# EAGLE board powerlinecontroller (EAGLE 5.08)
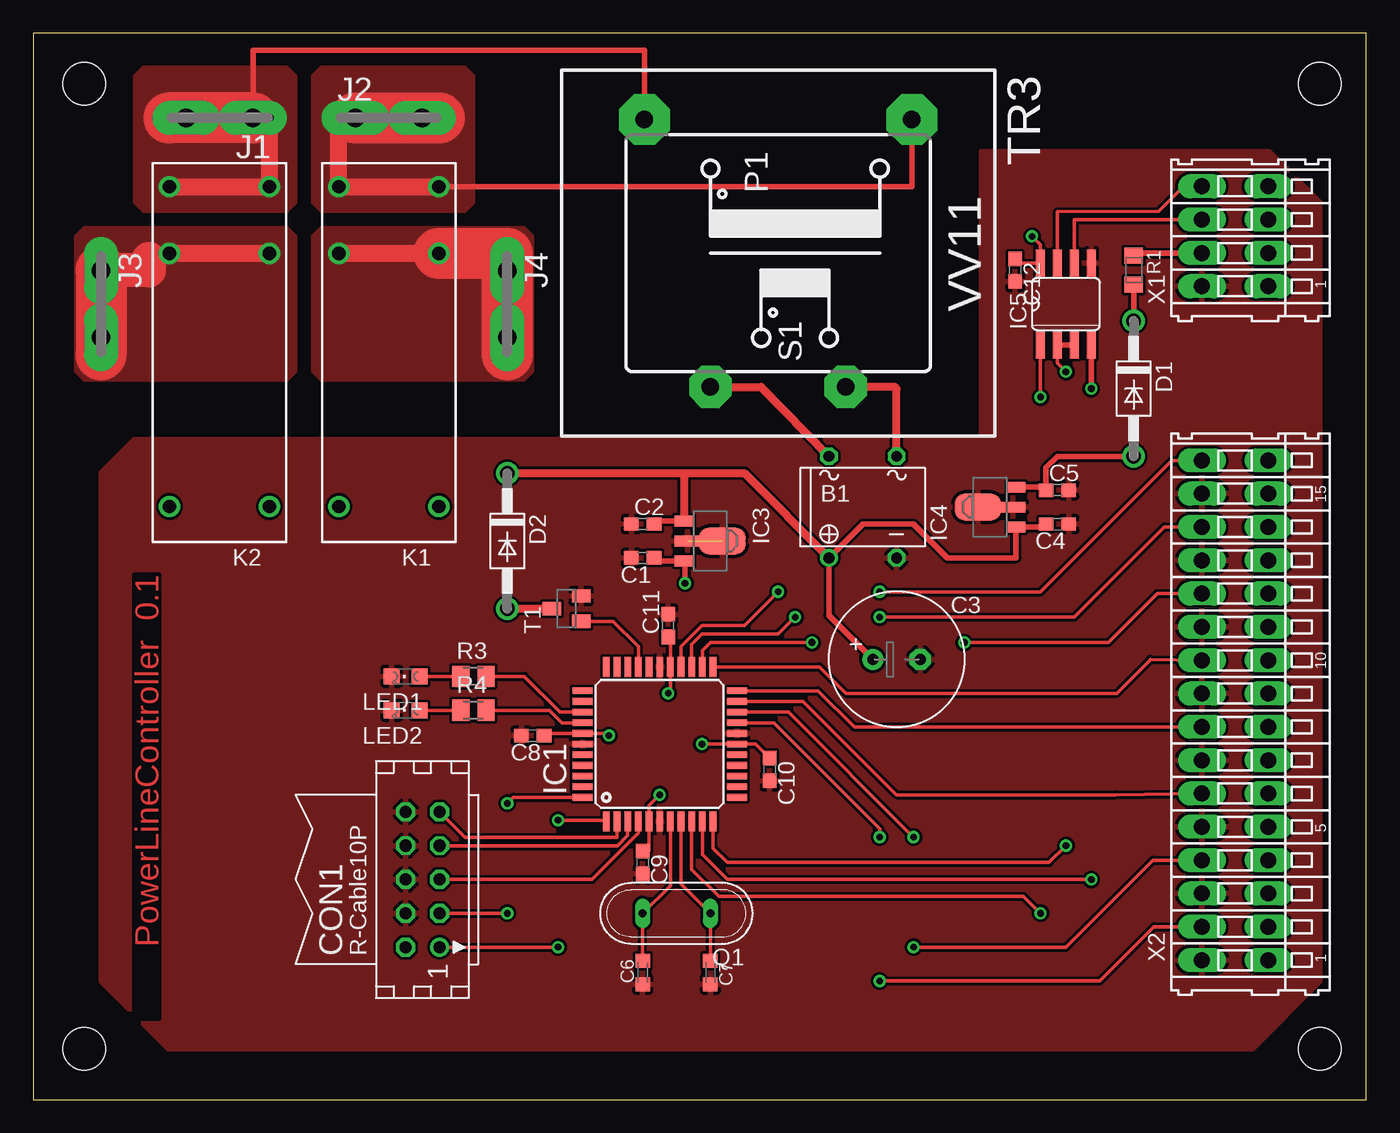
[diagram p0: board, top side]
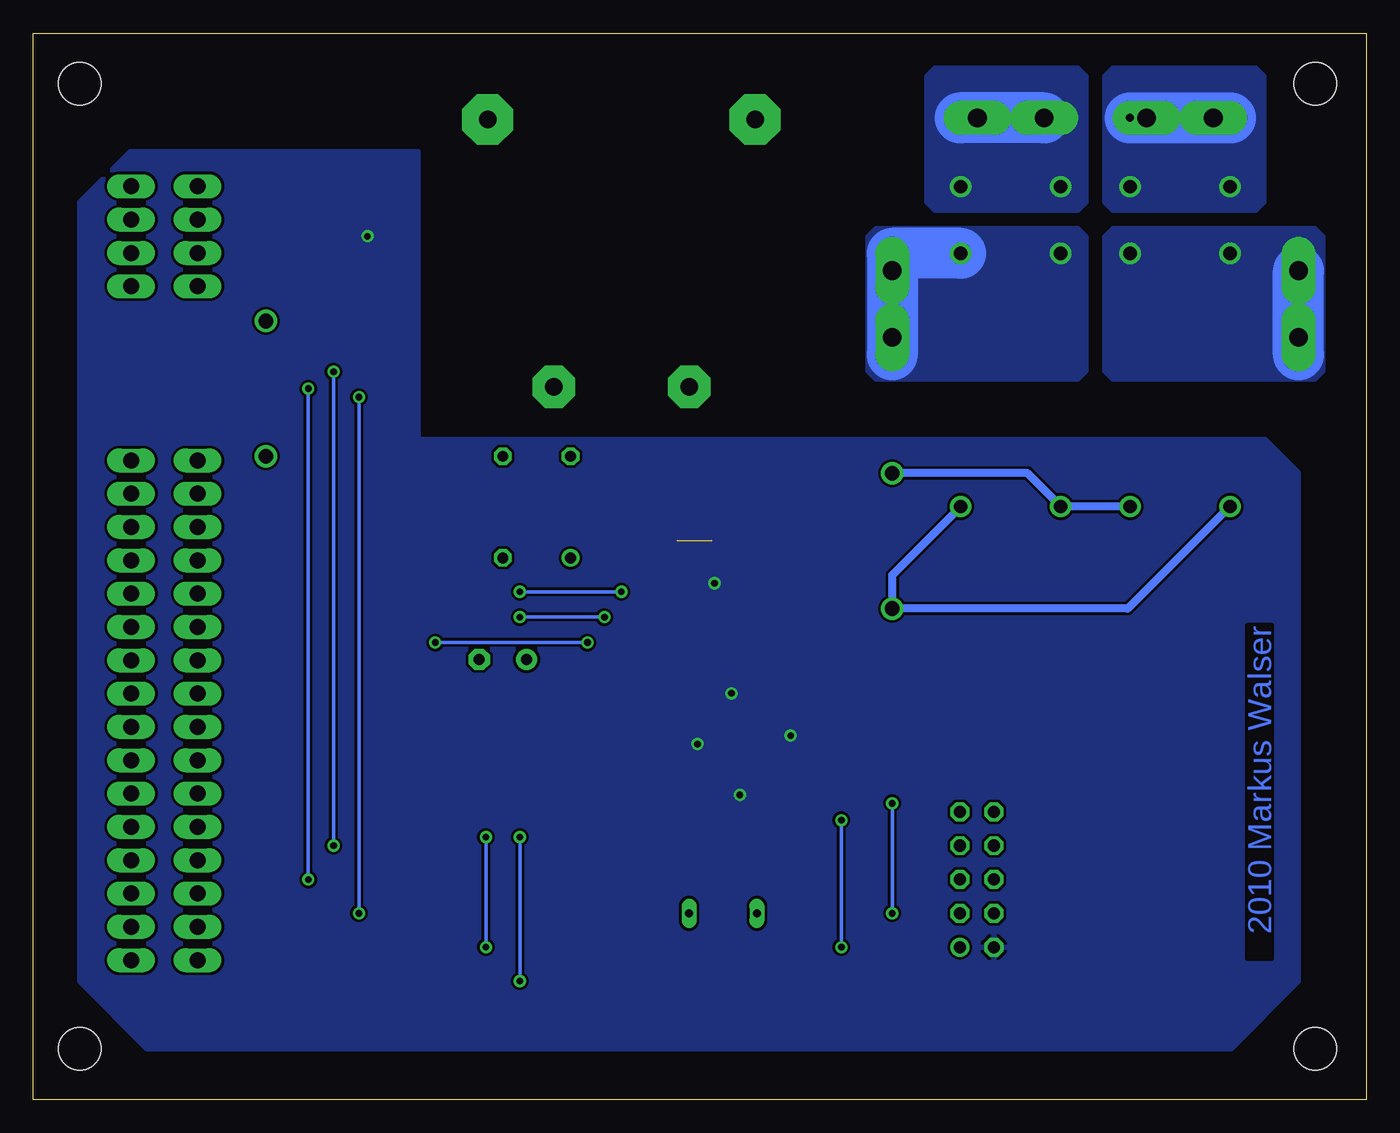
[diagram p1: board, bottom side, seen from below]

Size 100 x 80 mm. Coordinates in mm from the lower left corner, seen from the top.
Outline: 0,0 100,0 100,80 0,80 0,0
Copper layers (1*16): Top 0.035mm / dielectric 1.5mm / Bottom 0.035mm
Design rules "default": minimum track width 10mil, minimum drill 24mil, track to track 8mil, track to pad 8mil, pad to pad 8mil, via to via 8mil, smd to smd 8mil, copper to edge 40mil, drill to drill 8mil, minimum pad ring 10mil, minimum via ring 8mil, stop-mask expansion 4mil, vias tented up to drill 0mil, thermal gap 10mil
Holes 3.2 mm at 3.81,76.2 96.52,76.2 96.52,3.81 3.81,3.81

## Footprints (pad centres in the part's own frame; a part is rotated, then mirrored left to right if it is on the bottom)
B-DIL = drill 0.813 round: + -2.54,-3.81 | drill 0.813 octagon: - 2.54,-3.81; AC1 2.54,3.81; AC2 -2.54,3.81
C0603 = smd 1.1 x 1: 1 -0.85,0; 2 0.85,0
E3,5-10 = drill 0.813 pad 1.6 round: + -1.778,0 | drill 0.813 pad 1.6 octagon: - 1.778,0
C0603K = smd 1.05 x 1.08: 1 -0.875,0; 2 0.875,0
CON10 = drill 0.914 round: 1 -5.08,-1.27 | drill 0.914 octagon: 2 -5.08,1.27; 3 -2.54,-1.27; 4 -2.54,1.27; 5 0,-1.27; 6 0,1.27; 7 2.54,-1.27; 8 2.54,1.27; 9 5.08,-1.27; 10 5.08,1.27
DO41-10 = drill 1.118 round: A 5.08,0; C -5.08,0
TQFP44 = smd 1.5 x 0.5: 1 -5.8,4; 2 -5.8,3.2; 3 -5.8,2.4; 4 -5.8,1.6; 5 -5.8,0.8; 6 -5.8,0; 7 -5.8,-0.8; 8 -5.8,-1.6; 9 -5.8,-2.4; 10 -5.8,-3.2; 11 -5.8,-4; 23 5.8,-4; 24 5.8,-3.2; 25 5.8,-2.4; 26 5.8,-1.6; 27 5.8,-0.8; 28 5.8,0; 29 5.8,0.8; 30 5.8,1.6; 31 5.8,2.4; 32 5.8,3.2; 33 5.8,4 | smd 0.5 x 1.5: 12 -4,-5.8; 13 -3.2,-5.8; 14 -2.4,-5.8; 15 -1.6,-5.8; 16 -0.8,-5.8; 17 0,-5.8; 18 0.8,-5.8; 19 1.6,-5.8; 20 2.4,-5.8; 21 3.2,-5.8; 22 4,-5.8; 34 4,5.8; 35 3.2,5.8; 36 2.4,5.8; 37 1.6,5.8; 38 0.8,5.8; 39 0,5.8; 40 -0.8,5.8; 41 -1.6,5.8; 42 -2.4,5.8; 43 -3.2,5.8; 44 -4,5.8
SOT89 = smd 0.8 x 1.4: 1 -1.499,-1.981; 3 1.499,-1.981 | smd 0.8 x 1.9: 2 0,-1.727 | smd 2 x 3.5: 2.1 0,0.889
SO08 = smd 0.66 x 2.032: 1 -1.905,-3.073; 2 -0.635,-3.073; 3 0.635,-3.073; 4 1.905,-3.073; 5 1.905,3.073; 6 0.635,3.073; 7 -0.635,3.073; 8 -1.905,3.073
F061.100 = drill 1.4 pad 2.54 long: A1 -2.5,0; A2 2.5,0
FINDER-43.61 = drill 1 pad 1.6 round: 11@1 0,3.75; 11@2 0,-3.75; 14@1 5,3.75; 14@2 5,-3.75; A1 -19,-3.75; A2 -19,3.75
CHIPLED_0805 = smd 1.2 x 1.2: A 0,-1.05; C 0,1.05
QS = drill 0.61 long: 1 -2.54,0; 2 2.54,0
CT/CN0805 = smd 1.2 x 1.4: 1 -1.1,0; 2 1.1,0
M0805 = smd 1.3 x 1.6: 1 -0.95,0; 2 0.95,0
SOT23 = smd 1 x 1.4: 1 -0.95,-1.1; 2 0.95,-1.1; 3 0,1.1
VV11 = drill 1.321 pad 3.81 octagon: 1 -10.033,10.033; 5 -10.033,-10.033 | drill 1.321 pad 3.175 octagon: 7 10.033,-5.08; 9 10.033,5.08
233-104 = drill 1.2 long: A1 -3.75,2.5; A2 -1.25,2.5; A3 1.25,2.5; A4 3.75,2.5; B1 -3.75,-2.5; B2 -1.25,-2.5; B3 1.25,-2.5; B4 3.75,-2.5
233-116 = drill 1.2 long: A1 -18.75,2.5; A2 -16.25,2.5; A3 -13.75,2.5; A4 -11.25,2.5; A5 -8.75,2.5; A6 -6.25,2.5; A7 -3.75,2.5; A8 -1.25,2.5; A9 1.25,2.5; A10 3.75,2.5; A11 6.25,2.5; A12 8.75,2.5; A13 11.25,2.5; A14 13.75,2.5; A15 16.25,2.5; A16 18.75,2.5; B1 -18.75,-2.5; B2 -16.25,-2.5; B3 -13.75,-2.5; B4 -11.25,-2.5; B5 -8.75,-2.5; B6 -6.25,-2.5; B7 -3.75,-2.5; B8 -1.25,-2.5; B9 1.25,-2.5; B10 3.75,-2.5; B11 6.25,-2.5; B12 8.75,-2.5; B13 11.25,-2.5; B14 13.75,-2.5; B15 16.25,-2.5; B16 18.75,-2.5

## Placement (x,y rotation side)
B1  [B-DIL]  62.23,44.45 0 top
C1  [C0603]  45.72,40.64 180 top
C2  [C0603]  45.72,43.18 0 top
C3  1000uF  [E3,5-10]  64.77,33.02 0 top
C4  [C0603]  76.83,43.18 180 top
C5  [C0603]  76.83,45.72 0 top
C6  18pF  [C0603K]  45.72,9.53 90 top
C7  18pF  [C0603K]  50.8,9.53 270 top
C8  100nF  [C0603]  37.47,27.3 180 top
C9  100nF  [C0603]  45.72,17.78 270 top
C10  100nF  [C0603]  55.24,24.77 270 top
C11  100nF  [C0603]  47.62,35.56 90 top
C12  100nF  [C0603]  73.66,62.23 270 top
CON1  [CON10]  29.21,16.51 90 top
D1  1N4004  [DO41-10]  82.55,53.34 270 top
D2  1N4004  [DO41-10]  35.56,41.91 270 top
IC1  ATMEGA644A  [TQFP44]  46.99,26.67 90 top
IC3  78L05  [SOT89]  50.8,41.91 270 top
IC4  78L12  [SOT89]  71.75,44.45 90 top
IC5  MAX481CSA  [SO08]  77.47,59.69 0 top
J1  PIN2F061.100  [F061.100]  13.97,73.66 180 top
J2  PIN2F061.100  [F061.100]  26.67,73.66 0 top
J3  PIN2F061.100  [F061.100]  5.08,59.69 270 top
J4  PIN2F061.100  [F061.100]  35.56,59.69 270 top
K1  FINDER-43.61  [FINDER-43.61]  26.67,63.5 90 top
K2  FINDER-43.61  [FINDER-43.61]  13.97,63.5 90 top
LED1  Red  [CHIPLED_0805]  27.94,31.75 90 top
LED2  Green  [CHIPLED_0805]  27.94,29.21 90 top
Q1  16MHz  [QS]  48.26,13.97 180 top
R1  FUSE 100mA  [CT/CN0805]  82.55,62.23 270 top
R3  560E  [M0805]  33.02,31.75 0 top
R4  560E  [M0805]  33.02,29.21 0 top
T1  [SOT23]  40.01,36.83 90 top
TR3  Myrra 12V / 2.3VA  [VV11]  55.88,63.5 270 top
X1  [233-104]  90.17,64.77 90 top
X2  [233-116]  90.17,29.21 90 top

## Library data of the parts
B1 = rectifier
C1-C12 R3 R4 = rcl
CON1 = con-harting
D1 D2 = diode
IC1 = atmel
IC3 IC4 T1 = supervisor
IC5 = maxim
J1-J4 = con-faston
K1 K2 = relay
LED1 LED2 = led
Q1 = special
R1 = varistor
TR3 = trafo
X1 X2 = con-wago

## Nets
GND: B1.- C1.2 C2.1 C3.- C4.1 C5.2 C6.1 C7.2 C8.2 C9.2 C10.2 C11.2 C12.2 CON1.4 CON1.6 CON1.8 CON1.10 IC1.6 IC1.18 IC1.28 IC1.39 IC3.2 IC3.2.1 IC4.2 IC4.2.1 IC5.5 LED1.C LED2.C T1.2 X1.A1 X2.A1 X2.A3 X2.A5 X2.A7 X2.A9 X2.A11 X2.A13 X2.A15
N$1: IC1.9 IC5.1
N$2: IC1.10 IC5.4
N$3: D1.C R1.2
N$4: R1.1 X1.A2
N$5: B1.+ C2.2 C3.+ C4.2 D2.C IC3.1 IC4.1 K1.A2 K2.A1
N$6: J2.A1 K1.14@1 K1.14@2 TR3.1
N$7: J1.A1 K2.14@1 K2.14@2 TR3.5
N$8: J3.A1 K2.11@1 K2.11@2
N$9: B1.AC1 TR3.9
N$10: B1.AC2 TR3.7
N$11: IC5.6 X1.A3
N$12: C5.1 D1.A IC4.3
N$13: IC5.7 X1.A4
N$14: C6.2 IC1.7 Q1.2
N$15: C7.1 IC1.8 Q1.1
N$17: CON1.1 IC1.1
N$18: CON1.3 IC1.44
N$19: CON1.5 IC1.4
N$20: CON1.7 IC1.3
N$21: CON1.9 IC1.2
N$22: D2.A K1.A1 K2.A2 T1.3
N$23: IC1.30 T1.1
N$24: IC1.37 R4.2
N$25: IC1.36 R3.2
N$26: LED1.A R3.1
N$27: LED2.A R4.1
N$28: IC1.19 X2.A2
N$29: IC1.20 X2.A4
N$30: IC1.21 X2.A6
N$31: IC1.22 X2.A8
N$32: IC1.23 X2.A10
N$33: IC1.24 X2.A12
N$34: IC1.11 IC5.2 IC5.3
N$35: IC1.25 X2.A14
N$36: IC1.26 X2.A16
N$37: J4.A1 K1.11@1 K1.11@2
VCC: C1.1 C8.1 C9.1 C10.1 C11.1 C12.1 CON1.2 IC1.5 IC1.17 IC1.27 IC1.38 IC3.3 IC5.8

## Tracks (layer width: path | path; a pad name or v marks a point on that pad's centre or on a via)
GND  (1 unrouted)
  Top 0.406: IC4.2.1 IC4.2
  pour Top: 5.08,8.89 5.08,46.99 7.62,49.53 71.12,49.53 71.12,71.12 92.71,71.12 96.52,67.31 96.52,8.89 91.44,3.81 10.16,3.81
N$1  (via drill 0.5)
  Top 0.254: v75.56,52.7 IC5.1 | v75.56,13.97 74.3,15.24 51.44,15.24 49.39,17.29 IC1.9
  Bottom 0.254: v75.56,13.97 v75.56,52.7
N$2  (via drill 0.5)
  Top 0.254: v79.38,16.51 52.07,16.51 50.19,18.39 IC1.10
  Top 0.406: v79.38,53.34 IC5.4
  Bottom 0.254: v79.38,16.51 v79.38,53.34
N$3
  Top 0.406: D1.C R1.2
N$4
  Top 0.406: X1.A2 82.55,63.52 R1.1
N$5
  Top 0.406: C3.+ 59.69,36.32 B1.+ 62.23,43.18 66.04,43.18 68.58,40.64 73.74,40.64 IC4.1 75.98,42.95 C4.2 | IC3.1 46.8,43.41 arc90 C2.2
  Top 0.61: K1.A2 | D2.C 48.82,46.99 | 48.82,46.99 IC3.1 | B1.+ 53.34,46.99 48.82,46.99
  Bottom 0.61: D2.C 25.4,46.99 25.4,46.98 K1.A2 K2.A1
N$6
  Top 0.406: TR3.1 65.91,68.5 K1.14@2
  Top 1.27: K1.14@2 K1.14@1 22.92,73.66 J2.A1
  Top 3.81: J2.A1 30.48,73.66
  Bottom 3.81: J2.A1 30.48,73.66
  pour Top (no thermals): 21.59,77.47 32.38,77.47 33.02,76.83 33.02,67.31 32.38,66.67 21.59,66.67 20.95,67.31 20.95,76.83
  pour Bottom (no thermals): 20.95,76.83 21.59,77.47 32.38,77.47 33.02,76.83 33.02,67.31 32.38,66.67 21.59,66.67 20.95,67.31
N$7  (via drill 0.6)
  Top 0.406: TR3.5 45.85,78.74 16.51,78.74 16.51,73.66
  Top 1.27: K2.14@1 K2.14@2 v17.72,73.66 16.51,73.66 J1.A1
  Top 3.81: 16.51,73.66 10.16,73.66
  Bottom 3.81: v17.72,73.66 10.16,73.66
  pour Top (no thermals): 8.26,77.47 19.05,77.47 19.68,76.83 19.68,67.31 19.05,66.67 8.26,66.67 7.62,67.31 7.62,76.83
  pour Bottom (no thermals): 8.26,77.47 7.62,76.83 7.62,67.31 8.26,66.67 19.05,66.67 19.68,67.31 19.68,76.83 19.05,77.47
N$8
  Top 1.27: K2.11@2 K2.11@1 10.22,63.46 8.67,63.08 J3.A1
  Top 2.54: 8.67,63.08 8.67,62.23 5.08,62.23
  Top 3.81: 5.08,62.23 5.08,55.88
  Bottom 3.81: 5.08,55.88 J3.A1
  pour Top (no thermals): 3.81,65.41 19.05,65.41 19.68,64.77 19.68,54.61 19.05,53.98 3.81,53.98 3.17,54.61 3.17,64.77
  pour Bottom (no thermals): 19.05,65.41 19.68,64.77 19.68,54.61 19.05,53.98 3.81,53.98 3.17,54.61 3.17,64.77 3.81,65.41
N$9
  Top 0.61: B1.AC1 64.77,53.34 64.64,53.47 TR3.9
N$10
  Top 0.61: TR3.7 54.61,53.47 B1.AC2
N$11
  Top 0.254: X1.A3 78.11,66.02 IC5.6
N$12
  Top 0.406: D1.A 76.83,48.26 75.98,47.41 C5.1 75.98,45.95 IC4.3
N$13
  Top 0.254: X1.A4 86.3,68.52 84.45,66.67 76.83,66.61 IC5.7
N$14
  Top 0.254: IC1.7 47.79,16.04 Q1.2 C6.2
N$15
  Top 0.254: IC1.8 48.59,16.18 Q1.1 C7.1
N$17  (via drill 0.5)
  Top 0.254: CON1.1 v39.37,11.43 | v39.37,20.95 42.99,20.95 IC1.1
  Bottom 0.254: v39.37,11.43 v39.37,20.95
N$18  (via drill 0.5)
  Top 0.254: CON1.3 v35.56,13.97 | IC1.44 36.01,22.67 v35.56,22.23
  Bottom 0.254: v35.56,13.97 v35.56,22.23
N$19
  Top 0.254: IC1.4 45.39,19.99 41.91,16.51 CON1.5
N$20
  Top 0.254: IC1.3 44.59,19.82 43.81,19.05 CON1.7
N$21
  Top 0.254: CON1.9 32.38,19.68 43.79,19.68 IC1.2
N$22
  Top 0.61: D2.A T1.3
  Bottom 0.61: K2.A2 17.89,36.83 D2.A 35.56,39.36 K1.A1
N$23
  Top 0.254: IC1.30 45.39,33.98 43.49,35.88 T1.1
N$24
  Top 0.254: IC1.37 39.67,28.27 38.73,29.21 R4.2
N$25
  Top 0.254: IC1.36 39.51,29.07 36.83,31.75 R3.2
N$26
  Top 0.254: LED1.A R3.1
N$27
  Top 0.254: LED2.A R4.1
N$28  (via drill 0.5)
  Top 0.254: X2.A2 84.08,12.96 80.01,8.89 v63.5,8.89 | IC1.19 55.55,28.27 63.5,20.32 v63.5,19.68
  Bottom 0.254: v63.5,8.89 v63.5,19.68
N$29  (via drill 0.5)
  Top 0.254: IC1.20 56.66,29.07 v66.04,19.68 | v66.04,11.43 77.47,11.43 84,17.96 X2.A4
  Bottom 0.254: v66.04,11.43 v66.04,19.68
N$30
  Top 0.254: IC1.21 57.76,29.87 64.77,22.86 81.22,22.86 X2.A6
N$31
  Top 0.254: IC1.22 58.87,30.67 61.59,27.94 86.38,27.94 X2.A8
N$32
  Top 0.254: IC1.23 58.97,32.47 60.96,30.48 81.28,30.48 83.8,33 83.8,33.02 X2.A10
N$33  (via drill 0.5)
  Top 0.254: X2.A12 84.31,37.96 80.64,34.29 v69.85,34.29 | v58.42,34.29 50.8,34.29 50.19,33.68 IC1.24
  Bottom 0.254: v58.42,34.29 v69.85,34.29
N$34  (via drill 0.5)
  Top 0.254: IC5.2 76.83,55.24 v77.47,54.61 | v77.47,19.05 76.2,17.78 52.07,17.78 50.99,18.86 IC1.11
  Top 0.406: IC5.2 IC5.3
  Bottom 0.254: v77.47,19.05 v77.47,54.61
N$35  (via drill 0.5)
  Top 0.254: IC1.25 49.39,34.15 50.16,34.92 55.88,34.92 v57.15,36.2 | v63.5,36.2 78.11,36.2 84.87,42.96 X2.A14
  Bottom 0.254: v57.15,36.2 v63.5,36.2
N$36  (via drill 0.5)
  Top 0.254: X2.A16 85.42,47.96 75.56,38.1 v63.5,38.1 | v55.88,38.1 53.34,35.56 50.16,35.56 48.59,33.98 IC1.26
  Bottom 0.254: v55.88,38.1 v63.5,38.1
N$37
  Top 1.27: K1.11@1 K1.11@2 30.42,63.46
  Top 3.81: K1.11@2 35.56,63.5 35.56,55.88
  Bottom 3.81: K1.11@2 35.56,63.5 35.56,55.88
  pour Top (no thermals): 21.59,65.41 36.83,65.41 37.47,64.77 37.47,54.61 36.83,53.98 21.59,53.98 20.95,54.61 20.95,64.77
  pour Bottom (no thermals): 21.59,65.41 36.83,65.41 37.47,64.77 37.47,54.61 36.83,53.98 21.59,53.98 20.95,54.61 20.95,64.77
VCC  (via drill 0.5)
  Top 0.254: v74.93,64.77 75.56,64.14 IC5.8 73.98,62.76 arc-90 C12.1 | C11.1 47.79,34.71 IC1.27 47.79,30.64 v47.62,30.48 | IC3.3 48.9,40.41 | C8.1 38.48,27.47 IC1.38 43.02,27.47 v43.18,27.3 | v46.99,22.86 46.19,22.06 IC1.5 46.19,18.67 C9.1 | v50.16,26.67 IC1.17 54.19,26.67 C10.1
  Top 0.406: 48.9,40.41 v48.9,38.73 | IC3.3 46.8,40.41 arc-90 C1.1
  pour Bottom: 10.16,3.81 91.44,3.81 96.52,8.89 96.52,67.31 92.71,71.12 71.12,71.12 71.12,49.53 7.62,49.53 5.08,46.99 5.08,8.89

## Text on the board
Top: PowerLineController 0.1
Bottom: 2010 Markus Walser